# Altium PCB NIXIEclock最初版本.PcbDoc
Units mil, origin at the board's own origin, x right, y up, seen from the top; angles counter-clockwise.
Board outline 19595 x 11850 mil, 2 copper layers (Top Layer, Bottom Layer); 234 components, 293 nets, 859 pads, 7 vias.
Unrouted connection lines stored in the file: 377.
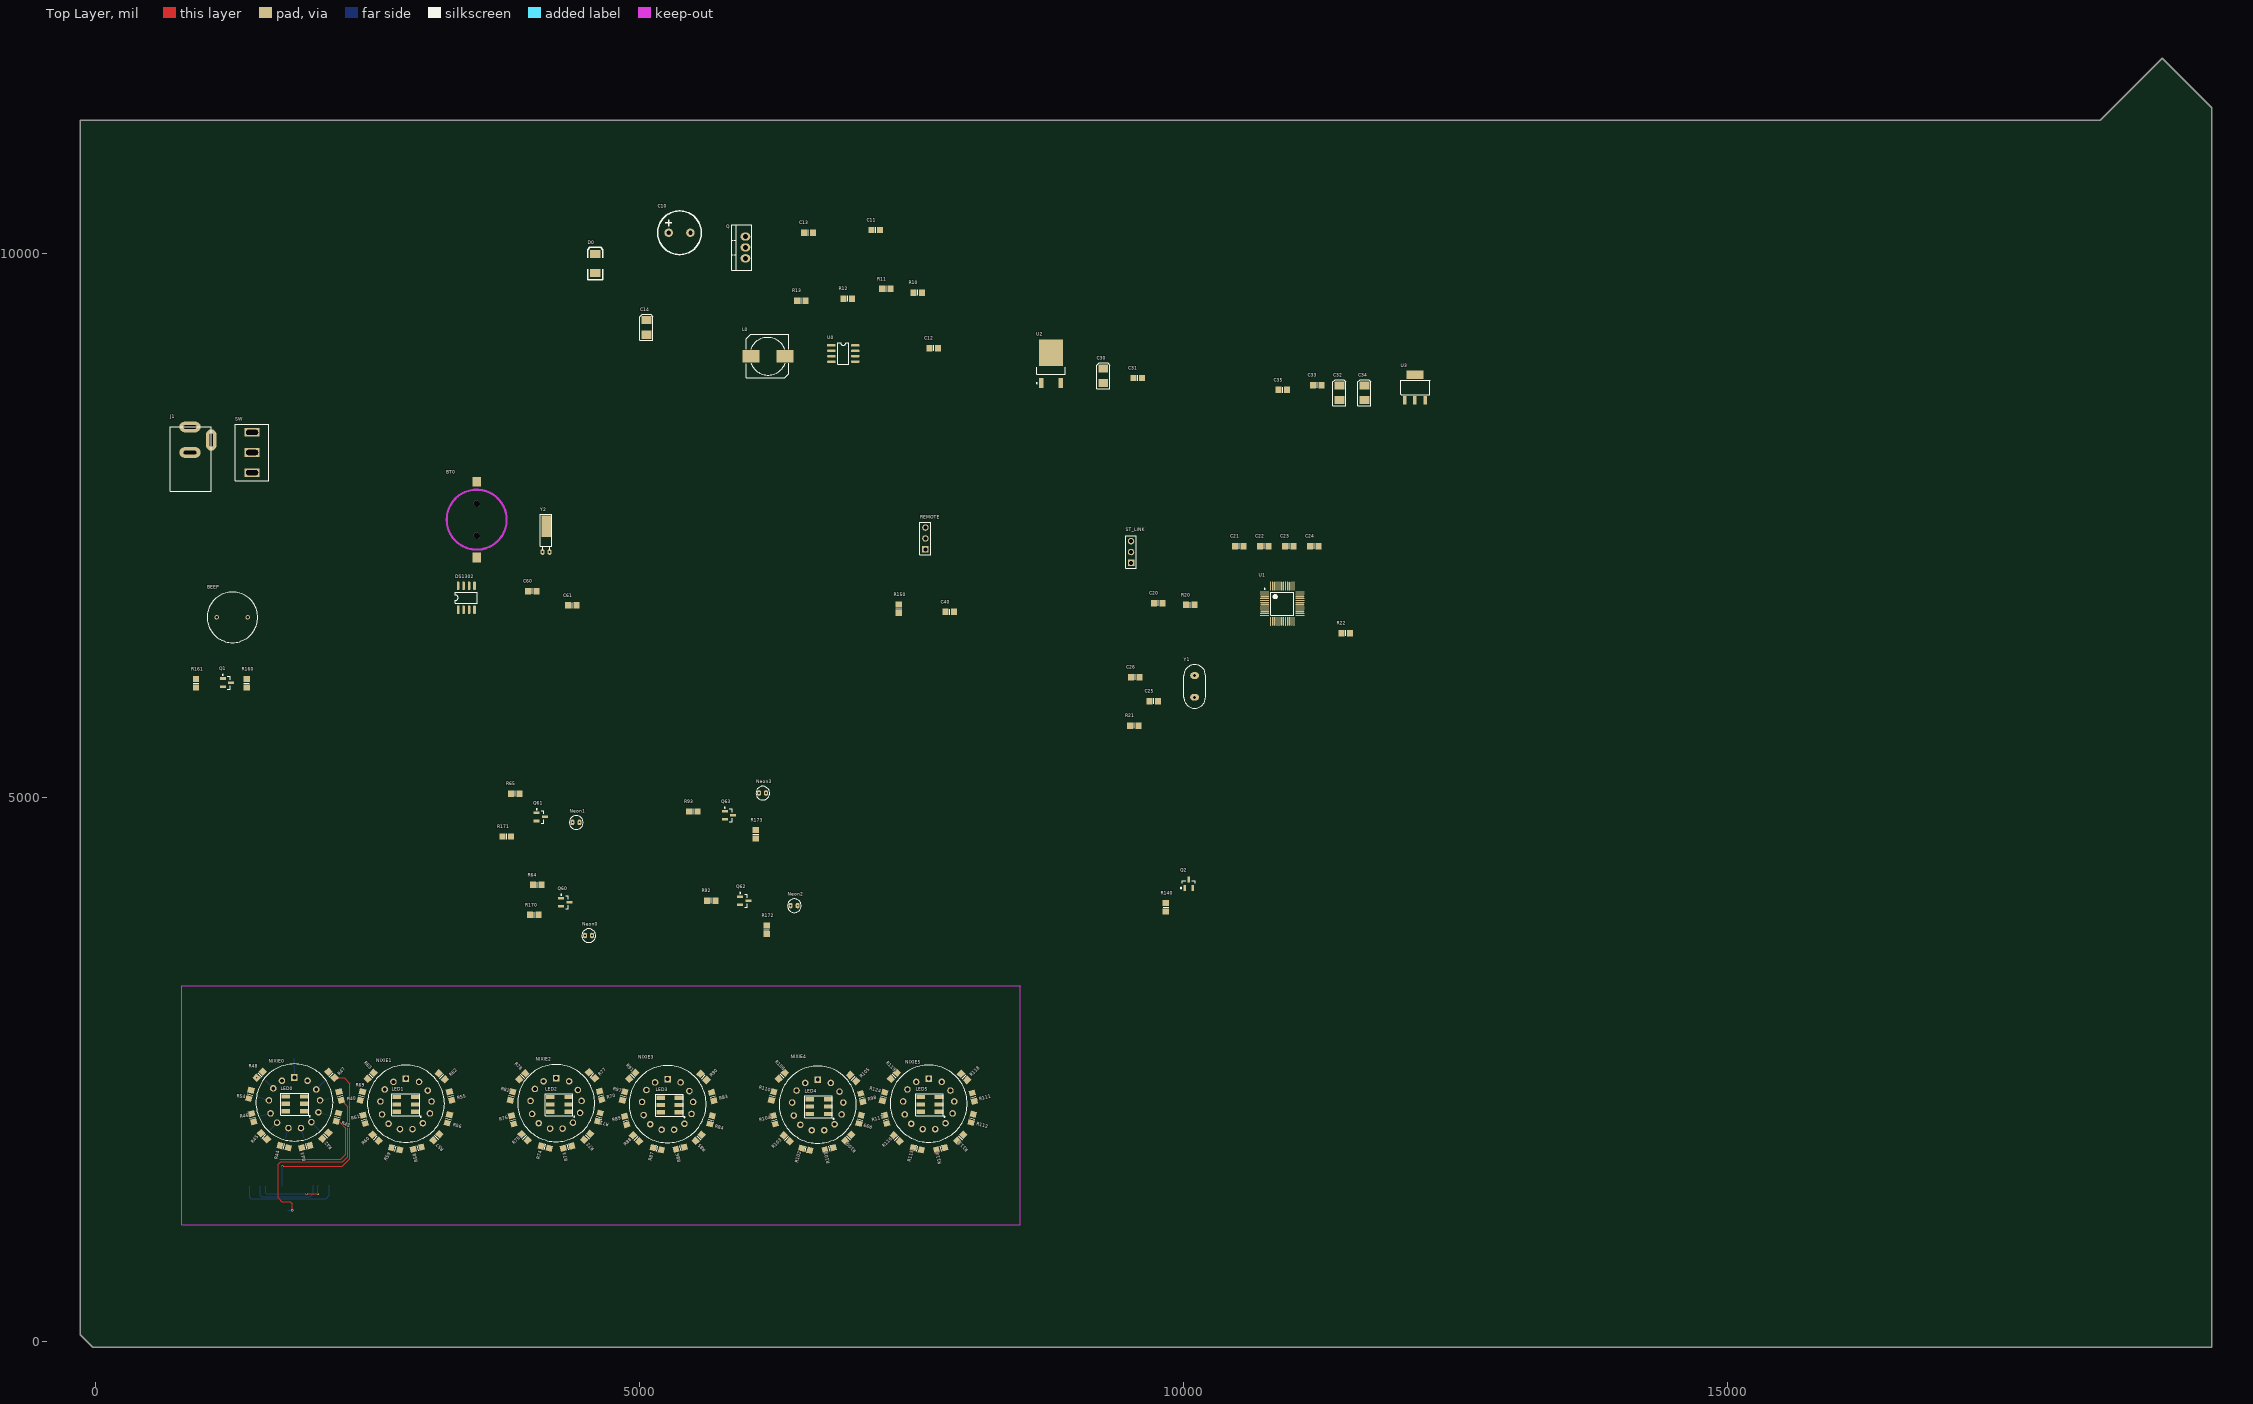
[diagram p0: Top Layer view]
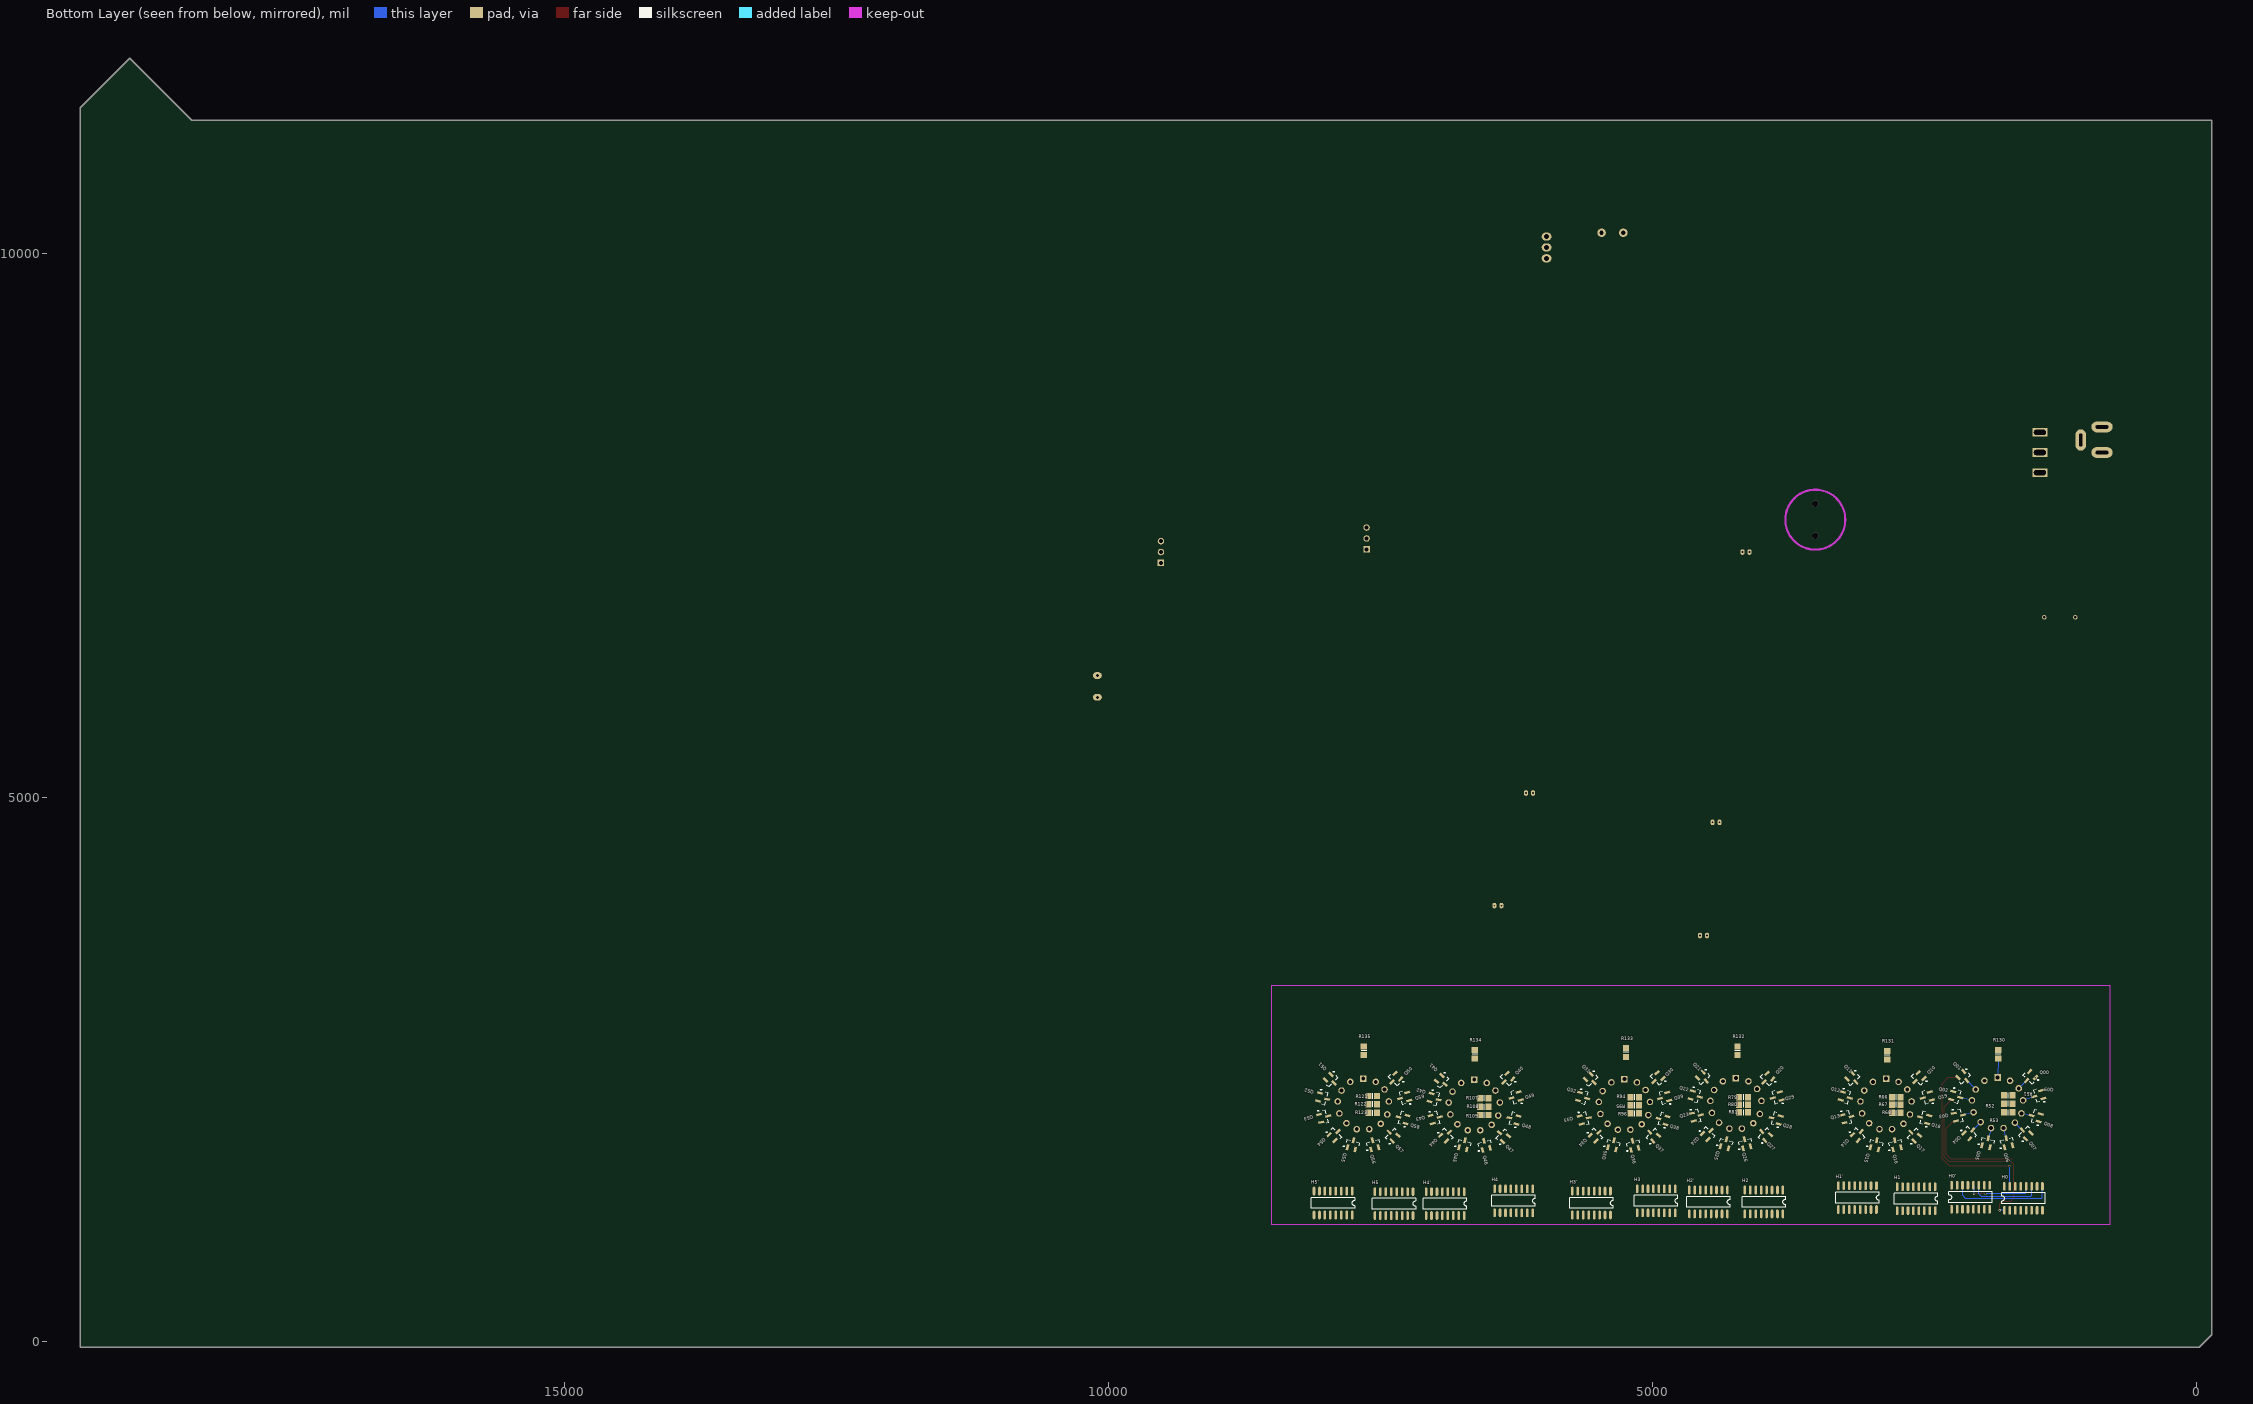
[diagram p1: Bottom Layer view, seen from below]

## Layer stack, top to bottom
Top Layer: signal copper 1.4
Dielectric: dielectric 12.6, FR-4, Dk 4.8
Bottom Layer: signal copper 1.4

## Board outline
0,-55 19450,-55 19450,11340 18995,11795 18425,11225 -145,11225 -145,60 -30,-55

## Design rules (kind name [scope] priority, off if disabled: settings)
Clearance [All] p1: gap=10
ComponentClearance [All] p1: gap=0 collisioncheckmode=3 verticalgap=0 showdistances=FALSE
PolygonConnect [All] p1: connectstyle=Relief reliefconductorwidth=10 reliefentries=4 polygonreliefangle="90 Angle" airgapwidth=10
RoutingCorners [All] p1: cornerstyle=Round minsetback=100 maxsetback=100
RoutingVias [All] p1: holewidth=28 width=50 viastyle="Through Hole" minholewidth=28 minwidth=50 maxholewidth=28 maxwidth=50
SilkToSolderMaskClearance [IsPad] p1: minsilkscreentomaskgap=0 clearancetoexposedcopper=TRUE
SolderMaskExpansion [All] p1: expansion=4
Width [All] p1: maxlimit=10 minlimit=10 preferedwidth=10
25 further rules are at their usual default settings.

## Components (designator, comment, footprint, x,y, rotation, side; value= is the part's Value field where it differs from the comment)
BEEP "Speaker" didi 1255,6655 r0 top
BT0 "Battery" CR1220 3500,7405 r90 top
C10 "250V" 1000UF 5265,10190 r0 top
C11 "Cap" 0805_M 7170,10215 r0 top
C12 "Cap" 0805_M 7700,9130 r0 top
C13 "Cap" 0805_M 6550,10190 r0 top
C14 "ap Pol1" 3528 5060,9320 r90 top
C20 "Cap Semi" 0805_M 9765,6785 r0 top
C21 "Cap Semi" 0805_M 10510,7310 r0 top
C22 "Cap Semi" 0805_M 10740,7310 r0 top
C23 "Cap Semi" 0805_M 10970,7310 r0 top
C24 "Cap Semi" 0805_M 11200,7310 r0 top
C25 "CAP" 0805_M 9725,5885 r0 top
C26 "CAP" 0805_M 9555,6105 r0 top
C30 "Cap Pol1" 3528 9260,8875 r90 top
C31 "104" 0805_M 9575,8855 r0 top
C32 "Cap Pol1" 3528 11430,8720 r90 top
C33 "Cap Semi" 0805_M 11225,8790 r0 top
C34 "Cap Pol1" 3528 11660,8720 r90 top
C35 "Cap Semi" 0805_M 10910,8745 r0 top
C40 "Cap" 0805_M 7850,6705 r0 top
C60 "Cap" 0805_M 4010,6895 r0 top
C61 "Cap" 0805_M 4380,6765 r0 top
D0 "SS14" 7227 4590,9820 r90 top
DS1302 "DS1302" SO-8 3330,6725 r90 top
H0 "74HC595" SO-16 1590,1190 r90 bottom
H0' "74HC595" SO-16 2075,1200 r90 bottom
H1 "74HC595" SO-16 2570,1435 r270 bottom
H1' "74HC595" SO-16 3110,1445 r270 bottom
H2 "74HC595" SO-16 3970,1405 r270 bottom
H2' "74HC595" SO-16 4480,1405 r270 bottom
H3 "74HC595" SO-16 4960,1415 r270 bottom
H3' "74HC595" SO-16 5555,1395 r270 bottom
H4 "74HC595" SO-16 6270,1415 r270 bottom
H4' "74HC595" SO-16 6900,1390 r270 bottom
H5 "74HC595" SO-16 7370,1390 r270 bottom
H5' "74HC595" SO-16 7930,1395 r270 bottom
J1 "JK" POWER 685,7815 r0 top
L0 "L" L101 6170,9050 r0 top
LED0 "LED.RGB" 5050LED 1735,2080 r0 top
LED1 "LED.RGB" 5050LED 2755,2075 r0 top
LED2 "LED.RGB" 5050LED 4165,2075 r0 top
LED3 "LED.RGB" 5050LED 5180,2070 r0 top
LED4 "LED.RGB" 5050LED 6550,2055 r0 top
LED5 "LED.RGB" 5050LED 7570,2075 r0 top
Neon0 "Neon" NEON 4560,3730 r90 top
Neon1 "Neon" NEON 4445,4770 r90 top
Neon2 "Neon" NEON 6450,4005 r90 top
Neon3 "Neon" NEON 6160,5040 r90 top
NIXIE0 "IN14" IN14 1825,2190 r0 top
NIXIE1 "IN14" IN14 2850,2180 r0 top
NIXIE2 "IN14" IN14 4230,2185 r0 top
NIXIE3 "IN14" IN14 5255,2175 r0 top
NIXIE4 "IN14" IN14 6635,2170 r0 top
NIXIE5 "IN14" IN14 7655,2180 r0 top
Q "IRF630" TO-220 5970,10055 r90 top
Q00 "A42" A42 1530,2425 r315 bottom
Q01 "A42" A42 2135,2425 r225 bottom
Q1 "QNPN" A42 1205,6055 r0 top
Q02 "A42" A42 2205,2250 r195 bottom
Q2 "QNPN" A42 10045,4205 r90 top
Q03 "A42" A42 2180,2070 r165 bottom
Q04 "A42" A42 2080,1915 r135 bottom
Q05 "A42" A42 1920,1830 r105 bottom
Q06 "A42" A42 1735,1830 r75 bottom
Q07 "A42" A42 1570,1915 r45 bottom
Q08 "A42" A42 1475,2065 r15 bottom
Q09 "A42" A42 1450,2260 r345 bottom
Q10 "A42" A42 2555,2415 r315 bottom
Q11 "A42" A42 3155,2410 r225 bottom
Q12 "A42" A42 3220,2245 r195 bottom
Q13 "A42" A42 3205,2055 r165 bottom
Q14 "A42" A42 3105,1900 r135 bottom
Q15 "A42" A42 2945,1810 r105 bottom
Q16 "A42" A42 2760,1810 r75 bottom
Q17 "A42" A42 2595,1895 r45 bottom
Q18 "A42" A42 2500,2050 r15 bottom
Q19 "A42" A42 2475,2245 r345 bottom
Q20 "A42" A42 3945,2410 r315 bottom
Q21 "A42" A42 4530,2420 r225 bottom
Q22 "A42" A42 4600,2255 r195 bottom
Q23 "A42" A42 4590,2070 r165 bottom
Q24 "A42" A42 4485,1910 r135 bottom
Q25 "A42" A42 4325,1820 r105 bottom
Q26 "A42" A42 4140,1820 r75 bottom
Q27 "A42" A42 3965,1900 r45 bottom
Q28 "A42" A42 3865,2045 r15 bottom
Q29 "A42" A42 3855,2245 r345 bottom
Q30 "A42" A42 4955,2415 r315 bottom
Q31 "A42" A42 5560,2405 r225 bottom
Q32 "A42" A42 5635,2240 r195 bottom
Q33 "A42" A42 5620,2045 r165 bottom
Q34 "A42" A42 5515,1895 r135 bottom
Q35 "A42" A42 5360,1810 r105 bottom
Q36 "A42" A42 5170,1805 r75 bottom
Q37 "A42" A42 4995,1895 r45 bottom
Q38 "A42" A42 4905,2040 r15 bottom
Q39 "A42" A42 4890,2240 r345 bottom
Q40 "A42" A42 6335,2410 r315 bottom
Q41 "A42" A42 6930,2390 r225 bottom
Q42 "A42" A42 7000,2230 r195 bottom
Q43 "A42" A42 6990,2050 r165 bottom
Q44 "A42" A42 6890,1895 r135 bottom
Q45 "A42" A42 6730,1810 r105 bottom
Q46 "A42" A42 6535,1805 r75 bottom
Q47 "A42" A42 6375,1890 r45 bottom
Q48 "A42" A42 6275,2045 r15 bottom
Q49 "A42" A42 6255,2245 r345 bottom
Q50 "A42" A42 7365,2410 r315 bottom
Q51 "A42" A42 7950,2400 r225 bottom
Q52 "A42" A42 8025,2235 r195 bottom
Q53 "A42" A42 8015,2060 r165 bottom
Q54 "A42" A42 7915,1900 r135 bottom
Q55 "A42" A42 7755,1810 r105 bottom
Q56 "A42" A42 7560,1810 r75 bottom
Q57 "A42" A42 7390,1895 r45 bottom
Q58 "A42" A42 7295,2050 r15 bottom
Q59 "A42" A42 7280,2240 r345 bottom
Q60 "A42" A42 4315,4035 r0 top
Q61 "A42" A42 4090,4820 r0 top
Q62 "A42" A42 5960,4050 r0 top
Q63 "A42" A42 5820,4835 r0 top
R10 "Res1" 0805_M 7555,9640 r0 top
R11 "Res1" 0805_M 7265,9675 r0 top
R12 "2K" 0805_M 6910,9585 r0 top
R13 "Res1" 0805_M 6485,9565 r0 top
R20 "Res2" 0805_M 10060,6770 r0 top
R21 "RES" 0805_M 9545,5660 r0 top
R22 "Res2" 0805_M 11490,6510 r0 top
R40 "Res1" 0805_M 2245,2255 r105 top
R41 "Res1" 0805_M 2220,2060 r75 top
R42 "Res1" 0805_M 2110,1890 r45 top
R43 "Res1" 0805_M 1930,1790 r15 top
R44 "Res1" 0805_M 1730,1790 r345 top
R45 "Res1" 0805_M 1545,1885 r315 top
R46 "Res1" 0805_M 1440,2055 r285 top
R47 "Res1" 0805_M 2165,2450 r315 top
R48 "Res1" 0805_M 1505,2450 r225 top
R51 "Res1" 0805_M 1725,2260 r0 bottom
R52 "Res1" 0805_M 1725,2185 r0 bottom
R53 "Res1" 0805_M 1725,2105 r0 bottom
R54 "Res1" 0805_M 1415,2270 r75 top
R55 "Res1" 0805_M 3260,2255 r105 top
R56 "Res1" 0805_M 3240,2045 r75 top
R57 "Res1" 0805_M 3130,1875 r45 top
R58 "Res1" 0805_M 2955,1775 r15 top
R59 "Res1" 0805_M 2755,1770 r345 top
R60 "Res1" 0805_M 2570,1870 r315 top
R61 "Res1" 0805_M 2465,2040 r285 top
R62 "Res1" 0805_M 3180,2435 r315 top
R63 "Res1" 0805_M 2525,2440 r225 top
R64 "Res1" 0805_M 4055,4195 r0 top
R65 "Res1" 0805_M 3855,5035 r0 top
R66 "Res1" 0805_M 2755,2245 r0 bottom
R67 "Res1" 0805_M 2755,2175 r0 bottom
R68 "Res1" 0805_M 2755,2100 r0 bottom
R69 "Res1" 0805_M 2440,2255 r75 top
R70 "Res1" 0805_M 4640,2260 r105 top
R71 "Res1" 0805_M 4625,2060 r75 top
R72 "Res1" 0805_M 4515,1880 r45 top
R73 "Res1" 0805_M 4335,1785 r15 top
R74 "Res1" 0805_M 4130,1785 r345 top
R75 "Res1" 0805_M 3940,1875 r315 top
R76 "Res1" 0805_M 3830,2035 r285 top
R77 "Res1" 0805_M 4560,2445 r315 top
R78 "Res1" 0805_M 3920,2435 r225 top
R79 "Res1" 0805_M 4160,2245 r0 bottom
R80 "Res1" 0805_M 4160,2175 r0 bottom
R81 "Res1" 0805_M 4160,2105 r0 bottom
R82 "Res1" 0805_M 3820,2255 r75 top
R83 "Res1" 0805_M 5670,2250 r105 top
R84 "Res1" 0805_M 5655,2035 r75 top
R85 "Res1" 0805_M 5540,1870 r45 top
R86 "Res1" 0805_M 5370,1775 r15 top
R87 "Res1" 0805_M 5160,1770 r345 top
R88 "Res1" 0805_M 4965,1865 r315 top
R89 "Res1" 0805_M 4870,2030 r285 top
R90 "Res1" 0805_M 5585,2430 r315 top
R91 "Res1" 0805_M 4930,2440 r225 top
R92 "Res1" 0805_M 5655,4050 r0 top
R93 "Res1" 0805_M 5490,4870 r0 top
R94 "Res1" 0805_M 5160,2245 r0 bottom
R95 "Res1" 0805_M 5160,2170 r0 bottom
R96 "Res1" 0805_M 5160,2095 r0 bottom
R97 "Res1" 0805_M 4850,2255 r75 top
R98 "Res1" 0805_M 7040,2240 r105 top
R99 "Res1" 0805_M 7025,2040 r75 top
R100 "Res1" 0805_M 6915,1870 r45 top
R101 "Res1" 0805_M 6740,1770 r15 top
R102 "Res1" 0805_M 6525,1765 r345 top
R103 "Res1" 0805_M 6350,1865 r315 top
R104 "Res1" 0805_M 6235,2035 r285 top
R105 "Res1" 0805_M 6960,2420 r315 top
R106 "Res1" 0805_M 6305,2440 r225 top
R107 "Res1" 0805_M 6545,2235 r0 bottom
R108 "Res1" 0805_M 6545,2155 r0 bottom
R109 "Res1" 0805_M 6545,2080 r0 bottom
R110 "Res1" 0805_M 6220,2255 r75 top
R111 "Res1" 0805_M 8065,2245 r105 top
R112 "Res1" 0805_M 8055,2050 r75 top
R113 "Res1" 0805_M 7945,1870 r45 top
R114 "Res1" 0805_M 7765,1770 r15 top
R115 "Res1" 0805_M 7550,1770 r345 top
R116 "Res1" 0805_M 7360,1865 r315 top
R117 "Res1" 0805_M 7260,2040 r285 top
R118 "Res1" 0805_M 7980,2430 r315 top
R119 "Res1" 0805_M 7335,2440 r225 top
R121 "Res1" 0805_M 7570,2255 r0 bottom
R122 "Res1" 0805_M 7570,2180 r0 bottom
R123 "Res1" 0805_M 7570,2100 r0 bottom
R124 "Res1" 0805_M 7240,2250 r75 top
R130 "Res1" 0805_M 1820,2640 r90 bottom
R131 "Res1" 0805_M 2840,2630 r90 bottom
R132 "Res1" 0805_M 4215,2670 r90 bottom
R133 "Res1" 0805_M 5240,2655 r90 bottom
R134 "Res1" 0805_M 6630,2640 r90 bottom
R135 "Res1" 0805_M 7650,2670 r90 bottom
R140 "Res1" 0805_M 9835,3990 r270 top
R150 "Res1" 0805_M 7380,6735 r90 top
R160 "Res2" 0805_M 1385,6050 r90 top
R161 "Res2" 0805_M 920,6050 r90 top
R170 "Res1" 0805_M 4030,3920 r180 top
R171 "Res1" 0805_M 3775,4640 r180 top
R172 "Res1" 0805_M 6165,3785 r90 top
R173 "Res1" 0805_M 6065,4660 r90 top
REMOTE "REMOTE" HDR1X3 7625,7280 r90 top
ST_LINK "ST_LINK" HDR1X3 9515,7155 r90 top
SW "SW-SPDT" SW 1590,7910 r90 top
U0 "MC34063" SO-8 6760,9155 r0 top
U1 "STM32F100C8T6BTR" LQFP48_M 10905,6780 r0 top
U2 "78L05_1" "78M05 DPAK TO-225" 8780,8985 r90 top
U3 "LM1117-3.3V" 1117 12030,8650 r0 top
Y1 "8M" XTAL 10100,6020 r90 top
Y2 "XTAL" X32768 4170,7255 r90 top

## Footprints (in the part's own frame and the unit in brackets; to place one, negate y for a bottom-side part, rotate by r counter-clockwise, add the part's x,y. Pads: shape width x height; smd on the part's side, far side on the other; paste and mask are expansions set on the pad)
"78M05 DPAK TO-225" [mm] "D-PAK, 3-Pads, Body 6.20x6.72mm (max), IPC Medium Density"
  rect 2.3x1 smd: 1(-4.5,-2.28) 3(-4.5,2.28)
  rect 6.1x5.55 smd: 2(2.6,0)
  silkscreen extent -4.62,-3.35 -0.85,3.45, body extent -2.4,-3.35 3.8,3.35, height 2.38
0805_M [mm] "Chip Resistor, Body 2.0x1.2mm, IPC Low Density"
  rect 1.4x1.5 smd: 1(-1,0) 2(1,0)
  silkscreen extent 0,-0.65 0,0.65, body extent -1.07,-0.7 1.07,0.7, height 0.7
1000UF [mm]
  round 2 hole 1: 1(0,0) 2(5.08,0)
  silkscreen extent -2.56,-5.1 7.64,5.1
1117 [mm]
  rect 0.8x2 smd: 1(0.009,-0.004) 2(2.409,-0.004) 3(4.809,-0.004)
  rect 4x2 smd: 4(2.409,5.996)
  silkscreen extent -0.89,1.35 5.86,4.65
3528 [mm]
  rect 1.9x2.28 smd: 1(-1.71,0) 2(1.71,0)
  silkscreen extent -3.02,-1.5 3.02,1.5
5050LED [mil]
  rect 78.74x39.37 smd: 1(10,170) 2(10,102.5) 3(10,35) 4(180,35) 5(180,102.5) 6(180,170)
  silkscreen extent -35,-15 235,200
7227 [mil]
  rect 75x100 smd: 1(175,0) 2(0,0)
  silkscreen extent -60,-70 235,70
A42 [mm] "SOT23, 3-Leads, Body 2.90x2.40mm, Pitch 0.95mm, IPC Medium Density"
  rect 1.4x0.6 smd: 1(0.975,0) 2(-0.975,0.95) 3(-0.975,-0.95)
  silkscreen extent -1.1,-1.5 0.7,1.92, body extent -0.7,-1.5 0.7,1.5, height 1.15
CR1220 [mm]
  rect 2.3x2 smd: 1(-5.1,0.025) 2(12.6,0)
  Keep-Out Layer lines w0.508: 10.749,0.121 ccw(c3.75,0) 10.75,0
didi [mm]
  round 1 hole 0.65: 1(-3.683,0) 2(3.556,0)
  silkscreen extent -5.9,-5.9 5.9,5.9
HDR1X3 [mm] "Connector; Header; 3 Position"
  rect 1.5x1.5 hole 0.9: 1(0,0)
  round 1.5 hole 0.9: 2(2.54,0) 3(5.08,0)
  silkscreen extent -1.27,-1.27 6.35,1.27
IN14 [mil]
  rect 60x60 hole 35.43: a(0,235)
  round 60 hole 35.43: b(120,205) c(200,125) d(235,25) e(220,-85) f(155,-175) g(60,-230) h(-55,-230) i(-160,-180) j(-220,-95) k(-235,25) l(-195,135) m(-115,205)
  silkscreen extent -354,-349 354,359
L101 [mm]
  rect 4x3 smd: 1(-3.797,0.124) 2(4.203,0.124)
  silkscreen extent -4.83,-4.95 5.08,5.21
LQFP48_M [mm] "Thin QFP, 48-Leads, Body 7x7mm, Pitch 0.5mm, IPC Low Density"
  oval 2.1x0.3 smd: 1(-4.1,2.75) 2(-4.1,2.25) 3(-4.1,1.75) 4(-4.1,1.25) 5(-4.1,0.75) 6(-4.1,0.25) 7(-4.1,-0.25) 8(-4.1,-0.75) 9(-4.1,-1.25) 10(-4.1,-1.75) 11(-4.1,-2.25) 12(-4.1,-2.75) 25(4.1,-2.75) 26(4.1,-2.25) 27(4.1,-1.75) 28(4.1,-1.25) 29(4.1,-0.75) 30(4.1,-0.25) 31(4.1,0.25) 32(4.1,0.75) 33(4.1,1.25) 34(4.1,1.75) 35(4.1,2.25) 36(4.1,2.75)
  oval 0.3x2.1 smd: 13(-2.75,-4.1) 14(-2.25,-4.1) 15(-1.75,-4.1) 16(-1.25,-4.1) 17(-0.75,-4.1) 18(-0.25,-4.1) 19(0.25,-4.1) 20(0.75,-4.1) 21(1.25,-4.1) 22(1.75,-4.1) 23(2.25,-4.1) 24(2.75,-4.1) 37(2.75,4.1) 38(2.25,4.1) 39(1.75,4.1) 40(1.25,4.1) 41(0.75,4.1) 42(0.25,4.1) 43(-0.25,4.1) 44(-0.75,4.1) 45(-1.25,4.1) 46(-1.75,4.1) 47(-2.25,4.1) 48(-2.75,4.1)
  silkscreen extent -4.22,-2.65 2.65,3.57, body extent -3.5,-3.5 3.5,3.5, height 1.6
NEON [mm]
  oval 1.3x1 hole 0.4: 1(0,0) 2(0,1.64)
  silkscreen extent -1.62,-0.84 1.57,2.36
POWER [mil]
  oval 196.85x98.43 hole 30 slot 118.11 at 0 deg: 1(180,590) 2(180,355)
  oval 98.43x196.85 hole 30 slot 118.11 at 90 deg: 3(375,470)
  silkscreen extent 0,0 375,590
SO-8 [mil]
  rect 80x24 smd: 1(0,0)
  oval 80x24 smd: 2(0,-50) 3(0,-100) 4(0,-150) 5(220,-150) 6(220,-100) 7(220,-50) 8(220,0)
  silkscreen extent 60,-175 160,25
SO-16 [mil]
  oval 80x24 smd: 1(14,172) 2(14,122) 3(14,72) 4(14,22) 5(14,-28) 6(14,-78) 7(14,-128) 8(14,-178) 9(234,-178) 10(234,-128) 11(234,-78) 12(234,-28) 13(234,22) 14(234,72) 15(234,122) 16(234,172)
  silkscreen extent 74,-203 174,197
SW [mm]
  rect 2x3.5 hole 1.2 slot 2.8 at 90 deg: 1(1.905,3.937) 2(6.604,3.937) 3(11.303,3.937)
  silkscreen extent 0,0 13.21,7.87
TO-220 [mil]
  oval 75x90 hole 45: 1(-100,0) 2(0,0) 3(100,0)
  silkscreen extent -208,-58 208,125
X32768 [mm]
  oval 1.3x1 hole 0.4: 1(0,0) 2(0,1.64)
  rect 5x2.2 smd: 3(6,0.82)
  silkscreen extent 0.51,-0.56 8.77,2.17
XTAL [mil]
  oval 62x82 hole 28: 1(-100,0) 2(100,0)
  silkscreen extent -200,-100 200,100

## Part data
BEEP: "Loudspeaker"
BT0: "Multicell Battery"
C10 C14: library part "Cap Pol1", "Polarized Capacitor (Radial)"
C11 C12 C13 C40 C60 C61: "Capacitor"
C20 C21 C22 C23 C24 C33 C35: "Capacitor (Semiconductor SIM Model)"
C30 C32 C34: "Polarized Capacitor (Radial)"
C31: library part CAP, "Capacitor"
D0: library part "Diode 18TQ045", "Schottky Rectifier"
DS1302: library part Component_3
L0: library part "Inductor Iron", "Magnetic-Core Inductor"
Neon0 Neon1 Neon2 Neon3: "Neon Bulb"
Q: library part MOSFET-N, "N-Channel MOSFET"
Q00 Q01 Q02 Q03 Q04 Q05 Q06 Q07 Q08 Q09 Q10 Q11 Q12 Q13 Q14 Q15 Q16 Q17 Q18 Q19 Q20 Q21 Q22 Q23 Q24 Q25 Q26 Q27 Q28 Q29 Q30 Q31 Q32 Q33 Q34 Q35 Q36 Q37 Q38 Q39 Q40 Q41 Q42 Q43 Q44 Q45 Q46 Q47 Q48 Q49 Q50 Q51 Q52 Q53 Q54 Q55 Q56 Q57 Q58 Q59 Q60 Q61 Q62 Q63: library part QNPN, "NPN Bipolar Transistor"
Q1 Q2: "NPN Bipolar Transistor"
R10 R11 R13 R20 R22 R40 R41 R42 R43 R44 R45 R46 R47 R48 R51 R52 R53 R54 R55 R56 R57 R58 R59 R60 R61 R62 R63 R64 R65 R66 R67 R68 R69 R70 R71 R72 R73 R74 R75 R76 R77 R78 R79 R80 R81 R82 R83 R84 R85 R86 R87 R88 R89 R90 R91 R92 R93 R94 R95 R96 R97 R98 R99 R100 R101 R102 R103 R104 R105 R106 R107 R108 R109 R110 R111 R112 R113 R114 R115 R116 R117 R118 R119 R121 R122 R123 R124 R130 R131 R132 R133 R134 R135 R140 R150 R160 R161 R170 R171 R172 R173: "Resistor"
R12: library part Res1, "Resistor"
SW: "SPDT Subminiature Toggle Switch, Right Angle Mounting, Vertical Actuation"
U1: "STM32 ARM-based 32-bit MCU Value Line with 64 kB Flash, 8 kB Internal RAM, Internal Code B, -40 to +85癈 Temperature, 48-Pin LQFP, Tape and Reel"
U3: library part 1117-5.0
Y1: library part XTAL, "Crystal Oscillator"
Y2: "Crystal Oscillator"

## Via types
v1: diameter 20, hole 12, Top Layer to Bottom Layer, 4 vias
v2: diameter 59.06, hole 59.06, Top Layer to Bottom Layer, 2 vias
v3: diameter 28, hole 15, Top Layer to Bottom Layer, 1 vias

## Nets (pads, with @x,y where several pads share a name; then routed paths per layer and width w, separated by ;. In a path a pad name is that pad's centre, name@x,y a point inside that pad or via, vN(x,y) a via of type N, cw(c..) or ccw(c..) an arc to the next point about the centre after c; other vN are vias at no path point)
595.DATA0: H0.14 U1.11
595.DATA1: H1.14 U1.14
595.DATA2: H2.14 U1.17
595.DATA3: H3.14 U1.20
595.DATA4: H4.14 U1.25
595.DATA5: H5.14 U1.28
595.SHCP0: H0'.11 H0.11 U1.13 | length 659.6
  Bottom Layer w10: H0.11 1512,1343 1525,1330 1970,1330 1997,1357 H0'.11
595.SHCP1: H1'.11 H1.11 U1.16
595.SHCP2: H2'.11 H2.11 U1.19
595.SHCP3: H3'.11 H3.11 U1.22
595.SHCP4: H4'.11 H4.11 U1.27
595.SHCP5: H5'.11 H5.11 U1.30
595.STCP0: H0'.12 H0.12 U1.12 | length 624.2
  Top Layer w10: v1(1935,1355) v1(2040,1355)
  Bottom Layer w10: H0.12 1562,1363 1570,1355 v1(1935,1355) ; v1(2040,1355) 2040,1427 H0'.12
595.STCP1: H1'.12 H1.12 U1.15
595.STCP2: H2'.12 H2.12 U1.18
595.STCP3: H3'.12 H3.12 U1.21
595.STCP4: H4'.12 H4.12 U1.26
595.STCP5: H5'.12 H5.12 U1.29
1302.CLK: DS1302.7 U1.31
1302.DATA: DS1302.6 U1.32
1302.RST: DS1302.5 U1.33
+3.3V: BEEP.1 C21.2 C22.2 C23.2 C24.2 C34.1 C35.2 C40.2 DS1302.1 R20.1 U1.8 U1.24 U1.36 U1.48 U3.2 U3.4
+5.0V: C32.1 C33.2 H0'.10 H0'.16 H0.10 H0.16 H1'.10 H1'.16 H1.10 H1.16 H2'.10 H2'.16 H2.10 H2.16 H3'.10 H3'.16 H3.10 H3.16 H4'.10 H4'.16 H4.10 H4.16 H5'.10 H5'.16 H5.10 H5.16 U2.1 U3.3
+12V: C13.1 C14.1 C30.1 C31.2 L0.2 SW.2 U0.1 U0.6 U0.7 U0.8 U2.3
+170V: C10.1 D0.2 Neon0.1 Neon1.1 Neon2.1 Neon3.1 R13.2 R130.2 R131.2 R132.2 R133.2 R134.2 R135.2
BEEP: R160.1 U1.45
BREATHCMD: LED0.4 LED0.5 LED0.6 LED1.4 LED1.5 LED1.6 LED2.4 LED2.5 LED2.6 LED3.4 LED3.5 LED3.6 LED4.4 LED4.5 LED4.6 LED5.4 LED5.5 LED5.6 Q2.1
GND: BT0.2 C10.2 C11.2 C12.1 C13.2 C14.2 C20.1 C21.1 C22.1 C23.1 C24.1 C25.1 C26.1 C30.2 C31.1 C32.2 C33.1 C34.2 C35.1 C40.1 C60.2 C61.2 DS1302.4 H0'.8 H0'.13 H0.8 H0.13 H1'.8 H1'.13 H1.8 H1.13 H2'.8 H2'.13 H2.8 H2.13 H3'.8 H3'.13 H3.8 H3.13 H4'.8 H4'.13 H4.8 H4.13 H5'.8 H5'.13 H5.8 H5.13 J1.2 Q00.3 Q01.3 Q1.3 Q2.3 Q02.3 Q03.3 Q04.3 Q05.3 Q06.3 Q07.3 Q08.3 Q09.3 Q10.3 Q11.3 Q12.3 Q13.3 Q14.3 Q15.3 Q16.3 Q17.3 Q18.3 Q19.3 Q20.3 Q21.3 Q22.3 Q23.3 Q24.3 Q25.3 Q26.3 Q27.3 Q28.3 Q29.3 Q30.3 Q31.3 Q32.3 Q33.3 Q34.3 Q35.3 Q36.3 Q37.3 Q38.3 Q39.3 Q40.3 Q41.3 Q42.3 Q43.3 Q44.3 Q45.3 Q46.3 Q47.3 Q48.3 Q49.3 Q50.3 Q51.3 Q52.3 Q53.3 Q54.3 Q55.3 Q56.3 Q57.3 Q58.3 Q59.3 Q.1 R10.1 R12.1 R22.2 R161.1 R170.2 R171.2 R172.2 R173.2 REMOTE.2 ST_LINK.3 SW.1 U0.4 U1.9 U1.23 U1.35 U1.47 U2.2 U3.1
H0.0: Q00.2 R48.2
  other v3: 1477.16,2422.16
H0.1: Q01.2 R47.1
H0.2: Q02.2 R40.2
H0.3: Q03.2 R41.2
H0.4: Q04.2 R42.2
H0.5: Q05.2 R43.2
H0.6: Q06.2 R44.2
H0.7: Q07.2 R45.2
H0.8: Q08.2 R46.2
H0.9: Q09.2 R54.1
H1.0: Q10.2 R63.2
H1.1: Q11.2 R62.1
H1.2: Q12.2 R55.2
H1.3: Q13.2 R56.2
H1.4: Q14.2 R57.2
H1.5: Q15.2 R58.2
H1.6: Q16.2 R59.2
H1.7: Q17.2 R60.2
H1.8: Q18.2 R61.2
H1.9: Q19.2 R69.1
H2.0: Q20.2 R78.2
H2.1: Q21.2 R77.1
H2.2: Q22.2 R70.2
H2.3: Q23.2 R71.2
H2.4: Q24.2 R72.2
H2.5: Q25.2 R73.2
H2.6: Q26.2 R74.2
H2.7: Q27.2 R75.2
H2.8: Q28.2 R76.2
H2.9: Q29.2 R82.1
H3.0: Q30.2 R91.2
H3.1: Q31.2 R90.1
H3.2: Q32.2 R83.2
H3.3: Q33.2 R84.2
H3.4: Q34.2 R85.2
H3.5: Q35.2 R86.2
H3.6: Q36.2 R87.2
H3.7: Q37.2 R88.2
H3.8: Q38.2 R89.2
H3.9: Q39.2 R97.1
H4.0: Q40.2 R106.2
H4.1: Q41.2 R105.1
H4.2: Q42.2 R98.2
H4.3: Q43.2 R99.2
H4.4: Q44.2 R100.2
H4.5: Q45.2 R101.2
H4.6: Q46.2 R102.2
H4.7: Q47.2 R103.2
H4.8: Q48.2 R104.2
H4.9: Q49.2 R110.1
H5.0: Q50.2 R119.2
H5.1: Q51.2 R118.1
H5.2: Q52.2 R111.2
H5.3: Q53.2 R112.2
H5.4: Q54.2 R113.2
H5.5: Q55.2 R114.2
H5.6: Q56.2 R115.2
H5.7: Q57.2 R116.2
H5.8: Q58.2 R117.2
H5.9: Q59.2 R124.1
LED0.B: LED0.1 R51.2
LED0.G: LED0.3 R53.2
LED0.R: LED0.2 R52.2
LED1.B: LED1.1 R66.2
LED1.G: LED1.3 R68.2
LED1.R: LED1.2 R67.2
LED2.B: LED2.1 R79.2
LED2.G: LED2.3 R81.2
LED2.R: LED2.2 R80.2
LED3.B: LED3.1 R94.2
LED3.G: LED3.3 R96.2
LED3.R: LED3.2 R95.2
LED4.B: LED4.1 R107.2
LED4.G: LED4.3 R109.2
LED4.R: LED4.2 R108.2
LED5.B: LED5.1 R121.2
LED5.G: LED5.3 R123.2
LED5.R: LED5.2 R122.2
LEDBREATH: R140.2 U1.41
NEON.0: Q60.2 R64.2
NEON.1: Q61.2 R65.2
NEON.2: Q62.2 R92.2
NEON.3: Q63.2 R93.2
NetBEEP_2: BEEP.2 Q1.1
NetBT0_1: BT0.1 DS1302.8
NetC11_1: C11.1 U0.3
NetC12_2: C12.2 R11.1 R12.2 U0.5
NetC60_1: C60.1 DS1302.3 Y2.1
NetC61_1: C61.1 DS1302.2 Y2.2
NetD0_3: D0.1 L0.1 Q.3
NetH0'_1: H0'.1 R48.1
NetH0'_4: H0'.4 R51.1
NetH0'_5: H0'.5 R52.1
NetH0'_6: H0'.6 R53.1
NetH0'_15: H0'.15 R54.2
NetH0_1: H0.1 R40.1 | length 1776.4
  Top Layer w10: v1(1805,1205) 1805,1265 1785,1285 1710,1285 1675,1320 1675,1626.57 1698.43,1650 2270,1650 2315,1695 2315,2157.16 R40.1
  Bottom Layer w10: H0.1 v1@1804,1204
NetH0_2: H0.2 R41.1 | length 974.5
  Top Layer w10: 1690,1675 2250,1675 2295,1720 2295,1960 2233.03,2021.97 R41.1
NetH0_3: H0.3 R42.1
NetH0_4: H0.4 R43.1
NetH0_5: H0.5 R44.1
NetH0_6: H0.6 R45.1
NetH0_7: H0.7 R46.1
NetH0_15: H0.15 R47.2 | length 1689.3
  Top Layer w10: v1(1715,1610) 2265,1610 2335,1680 2335,2368.79 2281.63,2422.16 R47.2
  Bottom Layer w10: H0.15 1715,1427 v1(1715,1610)
NetH1'_1: H1'.1 R63.1
NetH1'_2: H1'.2 R64.1
NetH1'_3: H1'.3 R65.1
NetH1'_4: H1'.4 R66.1
NetH1'_5: H1'.5 R67.1
NetH1'_6: H1'.6 R68.1
NetH1'_15: H1'.15 R69.2
NetH1_1: H1.1 R55.1
NetH1_2: H1.2 R56.1
NetH1_3: H1.3 R57.1
NetH1_4: H1.4 R58.1
NetH1_5: H1.5 R59.1
NetH1_6: H1.6 R60.1
NetH1_7: H1.7 R61.1
NetH1_15: H1.15 R62.2
NetH2'_1: H2'.1 R78.1
NetH2'_4: H2'.4 R79.1
NetH2'_5: H2'.5 R80.1
NetH2'_6: H2'.6 R81.1
NetH2'_15: H2'.15 R82.2
NetH2_1: H2.1 R70.1
NetH2_2: H2.2 R71.1
NetH2_3: H2.3 R72.1
NetH2_4: H2.4 R73.1
NetH2_5: H2.5 R74.1
NetH2_6: H2.6 R75.1
NetH2_7: H2.7 R76.1
NetH2_15: H2.15 R77.2
NetH3'_1: H3'.1 R91.1
NetH3'_2: H3'.2 R92.1
NetH3'_3: H3'.3 R93.1
NetH3'_4: H3'.4 R94.1
NetH3'_5: H3'.5 R95.1
NetH3'_6: H3'.6 R96.1
NetH3'_15: H3'.15 R97.2
NetH3_1: H3.1 R83.1
NetH3_2: H3.2 R84.1
NetH3_3: H3.3 R85.1
NetH3_4: H3.4 R86.1
NetH3_5: H3.5 R87.1
NetH3_6: H3.6 R88.1
NetH3_7: H3.7 R89.1
NetH3_15: H3.15 R90.2
NetH4'_1: H4'.1 R106.1
NetH4'_4: H4'.4 R107.1
NetH4'_5: H4'.5 R108.1
NetH4'_6: H4'.6 R109.1
NetH4'_15: H4'.15 R110.2
NetH4_1: H4.1 R98.1
NetH4_2: H4.2 R99.1
NetH4_3: H4.3 R100.1
NetH4_4: H4.4 R101.1
NetH4_5: H4.5 R102.1
NetH4_6: H4.6 R103.1
NetH4_7: H4.7 R104.1
NetH4_15: H4.15 R105.2
NetH5'_1: H5'.1 R119.1
NetH5'_4: H5'.4 R121.1
NetH5'_5: H5'.5 R122.1
NetH5'_6: H5'.6 R123.1
NetH5'_15: H5'.15 R124.2
NetH5_1: H5.1 R111.1
NetH5_2: H5.2 R112.1
NetH5_3: H5.3 R113.1
NetH5_4: H5.4 R114.1
NetH5_5: H5.5 R115.1
NetH5_6: H5.6 R116.1
NetH5_7: H5.7 R117.1
NetH5_15: H5.15 R118.2
NetJ1_1: J1.1 SW.3
NetNeon0_2: Neon0.2 Q60.1
NetNeon1_2: Neon1.2 Q61.1
NetNeon2_2: Neon2.2 Q62.1
NetNeon3_2: Neon3.2 Q63.1
NetNIXIE0_a: NIXIE0.a R130.1 | length 175.7
  Bottom Layer w10: R130.1 NIXIE0.a
NetNIXIE1_a: NIXIE1.a R131.1
NetNIXIE2_a: NIXIE2.a R132.1
NetNIXIE3_a: NIXIE3.a R133.1
NetNIXIE4_a: NIXIE4.a R134.1
NetNIXIE5_a: NIXIE5.a R135.1
NetQ1_2: Q1.2 R160.2 R161.2
NetQ2_2: Q2.2 R140.1
NetQ60_3: Q60.3 R170.1
NetQ61_3: Q61.3 R171.1
NetQ62_3: Q62.3 R172.1
NetQ63_3: Q63.3 R173.1
NetQ_2: Q.2 R10.2 U0.2
NetR11_2: R11.2 R13.1
NetR22_1: R22.1 U1.44
NetR150_1: R150.1 REMOTE.3
NIXIE0.0: NIXIE0.l Q00.1 | length 103
  Bottom Layer w10: Q00.1 NIXIE0.l
NIXIE0.1: NIXIE0.c Q01.1 | length 117.2
  Bottom Layer w10: NIXIE0.c Q01.1
NIXIE0.2: NIXIE0.d Q02.1 | length 110.8
  Bottom Layer w10: NIXIE0.d Q02.1
NIXIE0.3: NIXIE0.e Q03.1 | length 101.1
  Bottom Layer w10: NIXIE0.e Q03.1
NIXIE0.4: NIXIE0.f Q04.1 | length 103
  Bottom Layer w10: NIXIE0.f Q04.1
NIXIE0.5: NIXIE0.g Q05.1 | length 96.2
  Bottom Layer w10: NIXIE0.g Q05.1
NIXIE0.6: NIXIE0.h Q06.1 | length 96.2
  Bottom Layer w10: Q06.1 NIXIE0.h
NIXIE0.7: NIXIE0.i Q07.1 | length 96
  Bottom Layer w10: Q07.1 NIXIE0.i
NIXIE0.8: NIXIE0.j Q08.1 | length 95.1
  Bottom Layer w10: Q08.1 NIXIE0.j
NIXIE0.9: NIXIE0.k Q09.1 | length 108.7
  Bottom Layer w10: Q09.1 NIXIE0.k
NIXIE1.0: NIXIE1.l Q10.1
NIXIE1.1: NIXIE1.c Q11.1
NIXIE1.2: NIXIE1.d Q12.1
NIXIE1.3: NIXIE1.e Q13.1
NIXIE1.4: NIXIE1.f Q14.1
NIXIE1.5: NIXIE1.g Q15.1
NIXIE1.6: NIXIE1.h Q16.1
NIXIE1.7: NIXIE1.i Q17.1
NIXIE1.8: NIXIE1.j Q18.1
NIXIE1.9: NIXIE1.k Q19.1
NIXIE2.0: NIXIE2.l Q20.1
NIXIE2.1: NIXIE2.c Q21.1
NIXIE2.2: NIXIE2.d Q22.1
NIXIE2.3: NIXIE2.e Q23.1
NIXIE2.4: NIXIE2.f Q24.1
NIXIE2.5: NIXIE2.g Q25.1
NIXIE2.6: NIXIE2.h Q26.1
NIXIE2.7: NIXIE2.i Q27.1
NIXIE2.8: NIXIE2.j Q28.1
NIXIE2.9: NIXIE2.k Q29.1
NIXIE3.0: NIXIE3.l Q30.1
NIXIE3.1: NIXIE3.c Q31.1
NIXIE3.2: NIXIE3.d Q32.1
NIXIE3.3: NIXIE3.e Q33.1
NIXIE3.4: NIXIE3.f Q34.1
NIXIE3.5: NIXIE3.g Q35.1
NIXIE3.6: NIXIE3.h Q36.1
NIXIE3.7: NIXIE3.i Q37.1
NIXIE3.8: NIXIE3.j Q38.1
NIXIE3.9: NIXIE3.k Q39.1
NIXIE4.0: NIXIE4.l Q40.1
NIXIE4.1: NIXIE4.c Q41.1
NIXIE4.2: NIXIE4.d Q42.1
NIXIE4.3: NIXIE4.e Q43.1
NIXIE4.4: NIXIE4.f Q44.1
NIXIE4.5: NIXIE4.g Q45.1
NIXIE4.6: NIXIE4.h Q46.1
NIXIE4.7: NIXIE4.i Q47.1
NIXIE4.8: NIXIE4.j Q48.1
NIXIE4.9: NIXIE4.k Q49.1
NIXIE5.0: NIXIE5.l Q50.1
NIXIE5.1: NIXIE5.c Q51.1
NIXIE5.2: NIXIE5.d Q52.1
NIXIE5.3: NIXIE5.e Q53.1
NIXIE5.4: NIXIE5.f Q54.1
NIXIE5.5: NIXIE5.g Q55.1
NIXIE5.6: NIXIE5.h Q56.1
NIXIE5.7: NIXIE5.i Q57.1
NIXIE5.8: NIXIE5.j Q58.1
NIXIE5.9: NIXIE5.k Q59.1
OSCIN: C26.2 R21.1 U1.5 Y1.2
OSCOUT: C25.2 R21.2 U1.6 Y1.1
QH'.SI.0: H0'.14 H0.9 | length 946.6
  Bottom Layer w10: H0.9 1412,1323 1425,1310 2115,1310 2147,1342 H0'.14
QH'.SI.1: H1'.14 H1.9
QH'.SI.2: H2'.14 H2.9
QH'.SI.3: H3'.14 H3.9
QH'.SI.4: H4'.14 H4.9
QH'.SI.5: H5'.14 H5.9
REMOTE: R150.2 REMOTE.1 U1.46
REST: C20.2 R20.2 U1.7
SWCLK: ST_LINK.2 U1.37
SWDIO: ST_LINK.1 U1.34
pads on no net: H0'.2 H0'.3 H0'.7 H0'.9 H1'.7 H1'.9 H2'.2 H2'.3 H2'.7 H2'.9 H3'.7 H3'.9 H4'.2 H4'.3 H4'.7 H4'.9 H5'.2 H5'.3 H5'.7 H5'.9 J1.3 NIXIE0.b NIXIE0.m NIXIE1.b NIXIE1.m NIXIE2.b NIXIE2.m NIXIE3.b NIXIE3.m NIXIE4.b NIXIE4.m NIXIE5.b NIXIE5.m U1.1 U1.2 U1.3 U1.4 U1.10 U1.38 U1.39 U1.40 U1.42 U1.43 Y2.3
copper on no net:
  other v2: 3500,7405 3500,7700.28

## Keep-outs
Keep-Out Layer:
  lines w10: 8495,3270 8495,1070 787.4,1070 787.4,3270 8500,3270